# EAGLE board main_board (EAGLE 6.5.0)
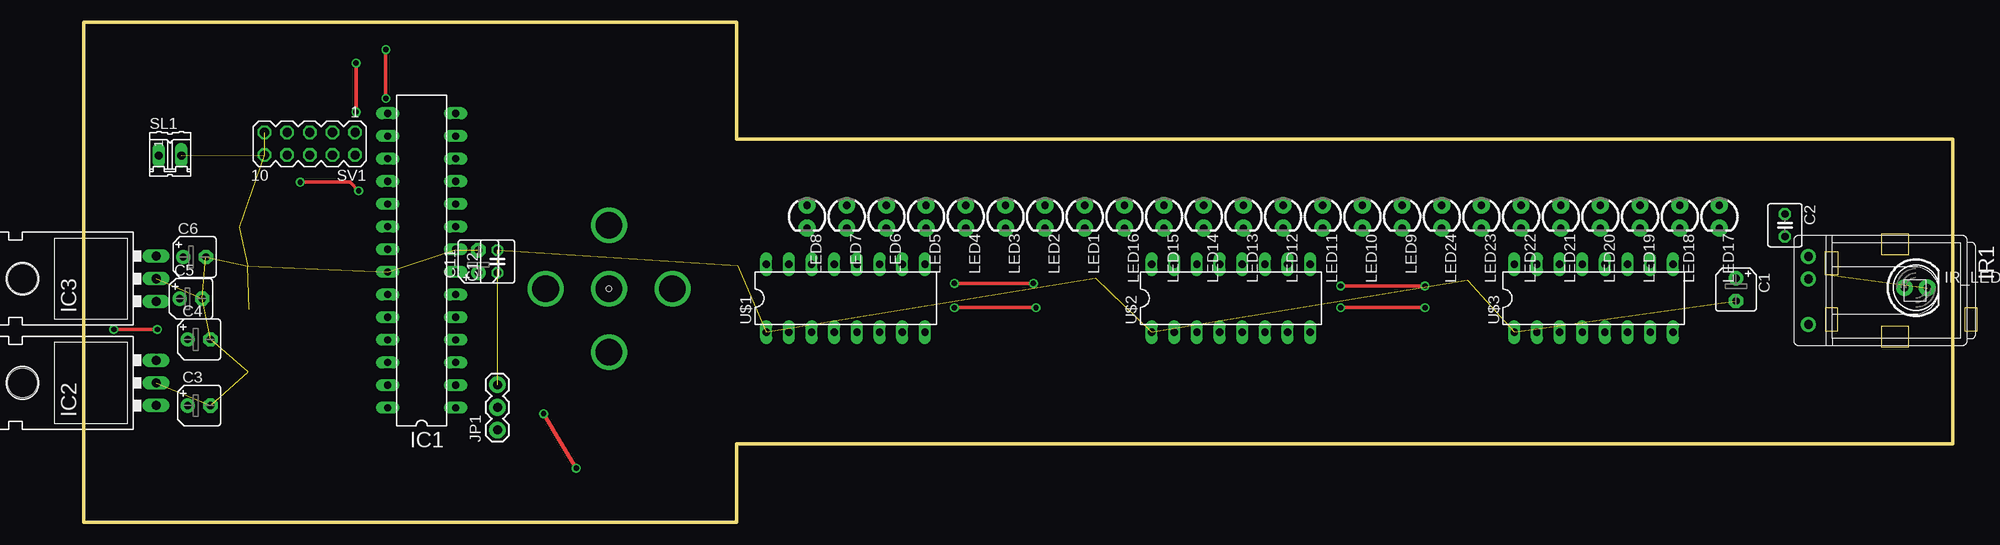
[diagram p0: board, top side]
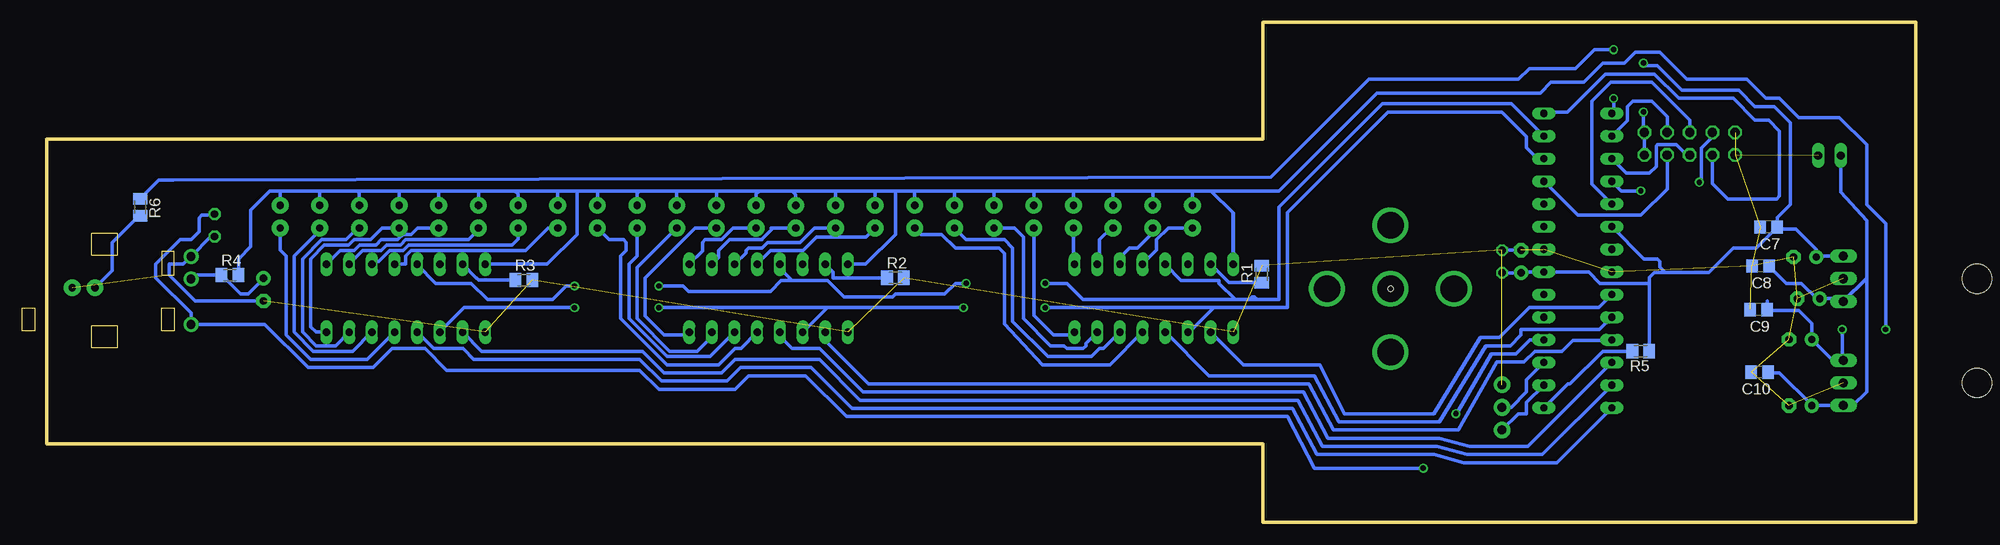
[diagram p1: board, bottom side, seen from below]

Size 209.4 x 56.08 mm. Coordinates in mm from the lower left corner, seen from the top.
Outline: 0,56.08 73.15,56.08 73.15,42.98 209.4,42.98 209.4,8.84 73.15,8.84 73.15,0 0,0 0,56.08
Copper layers (1*16): Top 0.035mm / dielectric 1.5mm / Bottom 0.035mm
Design rules "default": minimum track width 10mil, minimum drill 24mil, track to track 8mil, track to pad 8mil, pad to pad 8mil, via to via 8mil, smd to smd 8mil, copper to edge 40mil, drill to drill 8mil, minimum pad ring 10mil, minimum via ring 8mil, stop-mask expansion 4mil, vias tented up to drill 0mil, thermal gap 10mil
Holes 0.6 mm at 58.83,26.21

## Footprints (pad centres in the part's own frame; a part is rotated, then mirrored left to right if it is on the bottom)
B45181A = drill 0.813 pad 1.6: + -1.27,0 | drill 0.813 pad 1.6 octagon: - 1.27,0
C025-040X050 = drill 0.813 octagon: 1 -1.27,0; 2 1.27,0
C0805 = smd 1.3 x 1.5: 1 -0.95,0; 2 0.95,0
DIL28-3 = drill 0.813 long: 1 -16.51,-3.81; 2 -13.97,-3.81; 3 -11.43,-3.81; 4 -8.89,-3.81; 5 -6.35,-3.81; 6 -3.81,-3.81; 7 -1.27,-3.81; 8 1.27,-3.81; 9 3.81,-3.81; 10 6.35,-3.81; 11 8.89,-3.81; 12 11.43,-3.81; 13 13.97,-3.81; 14 16.51,-3.81; 15 16.51,3.81; 16 13.97,3.81; 17 11.43,3.81; 18 8.89,3.81; 19 6.35,3.81; 20 3.81,3.81; 21 1.27,3.81; 22 -1.27,3.81; 23 -3.81,3.81; 24 -6.35,3.81; 25 -8.89,3.81; 26 -11.43,3.81; 27 -13.97,3.81; 28 -16.51,3.81
TO-220-ALT = drill 1.016 long: GND 0,-3.81; IN -2.54,-3.81; OUT 2.54,-3.81 | hole 3.302: 0,11.176
TSOP17_TB1 = drill 1 pad 1.676: GND 0,-3.81; VO 0,3.81; VS 0,-1.27
LED5MM = drill 0.813 pad 1.88: A -1.27,0; K 1.27,0
1X03 = drill 1.016 pad 1.88: 1 0,0; 2 2.54,0; 3 5.08,0
LED3MM = drill 0.813 pad 1.88: A -1.27,0; K 1.27,0
M0805 = smd 1.3 x 1.6: 1 -0.95,0; 2 0.95,0
02P = drill 0.914 long: 1 -1.27,0; 2 1.27,0
MA05-2 = drill 1.016 octagon: 1 -5.08,-1.27; 2 -5.08,1.27; 3 -2.54,-1.27; 4 -2.54,1.27; 5 0,-1.27; 6 0,1.27; 7 2.54,-1.27; 8 2.54,1.27; 9 5.08,-1.27; 10 5.08,1.27
DIL16 = drill 0.813 long: CLK -3.81,-3.81; GND -8.89,-3.81; LE -1.27,-3.81; OE -1.27,3.81; OUT0 1.27,-3.81; OUT1 3.81,-3.81; OUT2 6.35,-3.81; OUT3 8.89,-3.81; OUT4 8.89,3.81; OUT5 6.35,3.81; OUT6 3.81,3.81; OUT7 1.27,3.81; R-EXT -6.35,3.81; SDI -6.35,-3.81; SDO -3.81,3.81; VCC -8.89,3.81

## Placement (x,y rotation side)
C1  4,7uF  [B45181A]  185.12,26.11 270 top
C2  10nF  [C025-040X050]  190.6,33.33 270 top
C3  47uF  [B45181A]  12.9,13.11 0 top
C4  47uF  [B45181A]  12.9,20.52 0 top
C5  47uF  [B45181A]  11.99,25.1 0 top
C6  47uF  [B45181A]  12.4,29.77 0 top
C7  100nF  [C0805]  16.46,33.12 180 bottom
C8  100nF  [C0805]  17.37,28.75 180 bottom
C9  100nF  [C0805]  17.58,23.88 180 bottom
C10  100nF  [C0805]  17.48,16.87 180 bottom
C11  22uF  [B45181A]  44.2,29.26 90 top
C12  100nF  [C025-040X050]  46.33,29.26 90 top
IC1  MEGA8-P  [DIL28-3]  37.85,29.36 90 top
IC2  5V  [TO-220-ALT]  4.27,15.65 90 top
IC3  3V3  [TO-220-ALT]  4.27,27.33 90 top
IR1  TSOP1730TB1  [TSOP17_TB1]  193.24,26.01 180 top
IR_LED  [LED5MM]  205.28,26.31 0 top
JP1  [1X03]  46.33,10.36 90 top
LED1  [LED3MM]  112.14,34.29 270 top
LED2  [LED3MM]  107.7,34.29 270 top
LED3  [LED3MM]  103.25,34.29 270 top
LED4  [LED3MM]  98.81,34.29 270 top
LED5  [LED3MM]  94.36,34.29 270 top
LED6  [LED3MM]  89.92,34.29 270 top
LED7  [LED3MM]  85.47,34.29 270 top
LED8  [LED3MM]  81.03,34.29 270 top
LED9  [LED3MM]  147.7,34.29 270 top
LED10  [LED3MM]  143.26,34.29 270 top
LED11  [LED3MM]  138.81,34.29 270 top
LED12  [LED3MM]  134.37,34.29 270 top
LED13  [LED3MM]  129.92,34.29 270 top
LED14  [LED3MM]  125.48,34.29 270 top
LED15  [LED3MM]  121.03,34.29 270 top
LED16  [LED3MM]  116.59,34.29 270 top
LED17  [LED3MM]  183.26,34.29 270 top
LED18  [LED3MM]  178.82,34.29 270 top
LED19  [LED3MM]  174.37,34.29 270 top
LED20  [LED3MM]  169.93,34.29 270 top
LED21  [LED3MM]  165.48,34.29 270 top
LED22  [LED3MM]  161.04,34.29 270 top
LED23  [LED3MM]  156.59,34.29 270 top
LED24  [LED3MM]  152.15,34.29 270 top
R1  330  [M0805]  73.25,27.84 90 bottom
R2  330  [M0805]  114.3,27.43 0 bottom
R3  330  [M0805]  155.96,27.18 0 bottom
R4  100  [M0805]  188.87,27.74 0 bottom
R5  1k  [M0805]  30.78,19.2 180 bottom
R6  100  [M0805]  198.93,35.36 270 bottom
SL1  [02P]  9.65,41.15 0 top
SV1  [MA05-2]  25.3,42.47 180 top
U$1  MBI5168GN  [DIL16]  85.34,25.15 0 top
U$2  MBI5168GN  [DIL16]  128.52,25.15 0 top
U$3  MBI5168GN  [DIL16]  169.16,25.15 0 top

## Library data of the parts
C1 C3-C6 C11 R1-R6 = resistor
C2 C7-C10 C12 = rcl
IC1 = atmel; OC_FARNELL: unknown; OC_NEWARK: unknown
IC2 IC3 = SparkFun-PowerIC
IR1 = telefunken; OC_FARNELL: unknown; OC_NEWARK: unknown
IR_LED LED1-LED24 = SparkFun-LED
JP1 = SparkFun-Connectors
SL1 = con-amp-quick; OC_FARNELL: unknown; OC_NEWARK: unknown
SV1 = con-lstb; OC_FARNELL: unknown; OC_NEWARK: unknown
U$1-U$3 = mbi5168gn

## Nets
CE: IC1.16 SV1.3
CLK: IC1.12 U$1.CLK U$2.CLK U$3.CLK
CSN: IC1.11 SV1.4
GND: C1.- C2.2 C3.- C4.- C5.- C6.- C7.2 C8.2 C9.2 C10.2 C11.- C12.2 IC1.8 IC1.22 IC2.GND IC3.GND IR1.GND IR_LED.K JP1.3 R1.2 R2.2 R3.2 SL1.2 SV1.9 SV1.10 U$1.GND U$2.GND U$3.GND
IR: IC1.15 R6.1
IWQ: IC1.14 SV1.8
LE_1: IC1.24 U$1.LE
LE_2: IC1.26 U$2.LE
LE_3: IC1.28 U$3.LE
MI: IC1.18 SV1.7
MO: IC1.17 SV1.6
N$1: LED8.K U$1.OUT7
N$2: LED7.K U$1.OUT6
N$3: LED6.K U$1.OUT5
N$4: LED5.K U$1.OUT4
N$5: LED4.K U$1.OUT3
N$6: LED3.K U$1.OUT2
N$7: LED2.K U$1.OUT1
N$8: LED1.K U$1.OUT0
N$9: LED17.K U$3.OUT0
N$10: LED18.K U$3.OUT1
N$11: LED19.K U$3.OUT2
N$12: LED20.K U$3.OUT3
N$13: LED21.K U$3.OUT4
N$14: LED22.K U$3.OUT5
N$15: LED23.K U$3.OUT6
N$16: LED24.K U$3.OUT7
N$17: LED13.K U$2.OUT4
N$18: LED14.K U$2.OUT5
N$19: LED15.K U$2.OUT6
N$20: LED16.K U$2.OUT7
N$21: LED12.K U$2.OUT3
N$22: LED11.K U$2.OUT2
N$23: LED10.K U$2.OUT1
N$24: LED9.K U$2.OUT0
N$25: C3.+ C5.+ C8.1 C10.1 IC2.IN IC3.IN SL1.1
N$26: R1.1 U$1.R-EXT
N$28: C1.+ IR1.VS R4.1
N$29: R3.1 U$3.R-EXT
N$30: R2.1 U$2.R-EXT
N$35: IR_LED.A R6.2
N$36: IC1.1 R5.2
OE: IC1.13 U$1.OE U$2.OE U$3.OE
RXD: IC1.2 JP1.1
SCK: IC1.19 SV1.5
SDI_1: IC1.23 U$1.SDI
SDI_2: IC1.25 U$2.SDI
SDI_3: IC1.27 U$3.SDI
TSOP: C2.1 IC1.4 IR1.VO
TXD: IC1.3 JP1.2
VCC3V3: C6.+ C7.1 C11.+ C12.1 IC1.7 IC1.20 IC3.OUT R5.1 SV1.1 SV1.2
VCC5V: C4.+ C9.1 IC2.OUT LED1.A LED2.A LED3.A LED4.A LED5.A LED6.A LED7.A LED8.A LED9.A LED10.A LED11.A LED12.A LED13.A LED14.A LED15.A LED16.A LED17.A LED18.A LED19.A LED20.A LED21.A LED22.A LED23.A LED24.A R4.2 U$1.VCC U$2.VCC U$3.VCC

## Tracks (layer width: path | path; a pad name or v marks a point on that pad's centre or on a via)
CE
  Bottom 0.406: SV1.3 27.84,45.52 29.57,47.24 31.7,47.24 32.31,46.64 32.31,45.06 IC1.16
CLK  (via drill 0.6)
  Top 0.406: v97.54,24.08 v106.68,24.08 | v140.82,24.08 v150.27,24.08
  Bottom 0.406: U$1.CLK 81.38,21.34 78.64,24.08 | 78.64,24.08 v97.54,24.08 | v106.68,24.08 121.92,24.08 | U$2.CLK 124.66,21.34 121.92,24.08 | 121.92,24.08 v140.82,24.08 | v150.27,24.08 162.61,24.08 U$3.CLK | 78.64,24.08 70.41,24.08 70.41,34.75 59.13,46.03 46.33,46.03 43.59,43.28 43.59,42.01 42.37,40.79 | IC1.12 42.37,40.79 | 42.37,40.79 42.62,40.79
CSN
  Bottom 0.406: SV1.4 27.84,37.39 30.79,34.44 37.85,34.44 IC1.11
GND  (24 unrouted)
  Bottom 0.406: 41.76,30.53 IC1.8 | C11.- C12.2 | C1.- 192.79,24.84 195.68,27.74 195.68,28.96 194.11,28.96 IR1.GND 191.01,32.06 C2.2
IR  (via drill 0.6)
  Top 0.406: v33.83,47.55 v33.83,53.04
  Bottom 0.406: IC1.15 33.83,45.87 v33.83,47.55 | v33.83,53.04 35.97,53.04 38.1,50.9 43.28,50.9 44.5,49.68 61.27,49.68 72.24,38.71 195.24,38.41 196.84,38.41 R6.1
IWQ
  Bottom 0.406: IC1.14 41.5,46.03 39.01,46.03 34.75,50.29 29.26,50.29 26.52,47.55 20.42,47.55 17.98,45.11 16.46,45.11 15.24,43.89 15.24,36.58 15.55,36.27 21.03,36.27 22.76,38 SV1.8
LE_1
  Bottom 0.406: IC1.24 35.41,21.64 44.2,21.64 44.2,21.03 45.42,19.81 48.16,19.81 53.34,11.28 64.62,11.28 67.36,16.46 79.2,16.46 U$1.LE
LE_2
  Bottom 0.406: IC1.26 43.43,8.54 49.99,8.54 53.34,9.45 65.84,9.45 68.58,14.63 117.96,14.63 122.83,19.51 125.88,19.51 127.25,20.88 U$2.LE
LE_3
  Bottom 0.406: U$3.LE 166.06,19.51 162.76,19.51 161.54,18.29 142.95,18.29 140.51,15.85 133.2,15.85 131.67,17.37 123.75,17.37 119.18,12.8 69.8,12.8 67.06,7.62 53.95,7.62 50.6,6.71 40.18,6.71 IC1.28
MI  (via drill 0.6)
  Top 0.406: v24.23,38.15 29.82,38.15 v30.79,37.19
  Bottom 0.406: SV1.7 22.76,43.18 23.98,41.96 23.98,38.41 v24.23,38.15 | v30.79,37.19 32.97,37.19 IC1.18
MO
  Bottom 0.406: SV1.6 25.3,40.84 26.82,42.37 28.9,42.37 29.06,42.22 29.06,39.93 29.82,39.17 32.41,39.17 IC1.17
N$1
  Bottom 0.406: LED8.K 83.72,33.02 85.04,31.7 85.04,30.53 U$1.OUT7
N$2
  Bottom 0.406: LED7.K 85.47,32.49 87.17,30.79 88.09,30.79 89,29.87 89,29.11 U$1.OUT6
N$3
  Bottom 0.406: LED6.K 90.12,33.02 91.44,31.7 91.44,29.21 U$1.OUT5
N$4
  Bottom 0.406: LED5.K 94.36,29.08 U$1.OUT4
N$5
  Bottom 0.406: U$1.OUT3 94.54,21.03 96.62,21.03 98.81,23.22 LED4.K
N$6
  Bottom 0.406: U$1.OUT2 92.96,20.07 92.96,19.81 93.27,19.51 95.1,19.51 95.4,19.81 96.93,19.81 99.97,22.86 99.97,32 100.99,33.02 LED3.K
N$7
  Bottom 0.406: LED2.K 106.38,31.7 102.11,31.7 101.19,30.79 101.19,22.56 97.23,18.59 92.35,18.59 91.44,19.51 90.98,19.51 U$1.OUT1
N$8
  Bottom 0.406: LED1.K 111.43,32.31 109.12,32.31 107.59,30.79 102.72,30.79 102.11,30.18 102.11,22.25 97.84,17.68 90.27,17.68 U$1.OUT0
N$9
  Bottom 0.406: LED17.K 183.26,30.56 182.57,29.87 182.57,21.03 179.83,18.29 173.48,18.29 U$3.OUT0
N$10
  Bottom 0.406: LED18.K 178.82,32.72 181.66,29.87 181.66,21.34 179.53,19.2 175.11,19.2 U$3.OUT1
N$11
  Bottom 0.406: LED19.K 174.55,33.02 175.87,31.7 178.61,31.7 180.75,29.57 180.75,21.34 179.22,19.81 177.04,19.81 U$3.OUT2
N$12
  Bottom 0.406: LED20.K 171.81,33.02 173.13,31.7 174.96,31.7 175.56,31.09 178.31,31.09 179.83,29.57 179.83,21.95 179.22,21.34 U$3.OUT3
N$13
  Bottom 0.406: LED21.K 167.84,33.02 168.55,32.31 169.47,32.31 170.08,31.7 171.91,31.7 172.52,31.09 174.35,31.09 174.96,30.48 176.53,30.48 U$3.OUT4
N$14
  Bottom 0.406: LED22.K 161.04,32.82 162.15,31.7 169.16,31.7 169.77,31.09 171.3,31.09 171.91,30.48 173.99,30.48 U$3.OUT5
N$15
  Bottom 0.406: LED23.K 156.59,31.78 157.28,31.09 168.86,31.09 169.47,30.48 170.99,30.48 172.21,29.26 172.67,29.26 U$3.OUT6
N$16
  Bottom 0.406: LED24.K 153.21,33.02 155.75,30.48 168.55,30.48 169.16,29.87 169.16,28.96 U$3.OUT7
N$17
  Bottom 0.406: LED13.K 132.49,33.02 133.81,31.7 135.64,31.7 135.94,31.4 135.94,30.43 U$2.OUT4
N$18
  Bottom 0.406: LED14.K 128.02,33.02 | 128.02,33.02 128.22,33.02 | U$2.OUT5 134.11,29.72 134.11,30.48 132.89,31.7 129.23,31.7 129.23,31.8 128.02,33.02
N$19
  Bottom 0.406: LED15.K 123.34,33.02 124.97,31.4 128.63,31.4 129.23,30.79 130.76,30.79 131.06,30.48 131.06,30.23 U$2.OUT6
N$20
  Bottom 0.406: U$2.OUT7 129.79,29.01 128.32,30.48 124.66,30.48 123.14,32 117.6,32 LED16.K
N$21
  Bottom 0.406: LED12.K 136.75,33.02 142.34,27.43 142.34,23.17 140.21,21.03 137.72,21.03 U$2.OUT3
N$22
  Bottom 0.406: U$2.OUT2 134.87,20.88 136.55,19.2 139.6,19.2 143.26,22.86 143.26,28.58 LED11.K
N$23
  Bottom 0.406: U$2.OUT1 135.08,18.59 139.9,18.59 144.17,22.86 144.17,28.96 143.26,29.87 LED10.K
N$24
  Bottom 0.406: U$2.OUT0 131.62,19.51 132.28,19.51 134.11,17.68 139.9,17.68 145.09,22.86 145.09,29.87 144.47,30.48 144.47,31.4 144.78,31.7 146.38,31.7 LED9.K
N$25
  Bottom 0.406: 5.49,27.43 5.49,27.38 | 5.49,27.38 IC3.IN | IC3.IN 8.08,24.84 5.49,27.43 | C10.1 16.42,16.76 15.24,16.76 11.63,13.16 C3.+ IC2.IN 7.01,13.11 5.49,14.63 5.49,27.38 | IC3.IN 8.38,25.1 C5.+ 11.07,25.1 12.8,26.82 14.49,26.82 C8.1 | 5.49,27.43 5.49,33.83 8.38,37.03 SL1.1
N$26
  Bottom 0.406: R1.1 76.96,26.92 U$1.R-EXT
N$27  (via drill 3)
  other vias: 58.83,33.33
N$28
  Bottom 0.406: C1.+ 185.17,27.43 185.17,27.28 186.84,25.6 187.69,25.6 R4.1 192.79,27.74 IR1.VS
N$29
  Bottom 0.406: R3.1 160.99,27.18 161.24,27.43 161.29,27.43 U$3.R-EXT
N$30
  Bottom 0.406: R2.1 121.31,27.43 121.31,28.09 U$2.R-EXT
N$31  (via drill 3)
  other vias: 51.71,26.21
N$32  (via drill 3)
  other vias: 58.83,19.1
N$33  (via drill 3)
  other vias: 65.94,26.21
N$34  (via drill 3)
  other vias: 58.83,26.21
N$35
  Bottom 0.406: R6.2 199.07,34.41 202.08,31.4 202.08,28.25 IR_LED.A
N$36
  Bottom 0.406: R5.2 35.05,19.2 38.71,15.55 38.96,15.55 IC1.1
OE  (via drill 0.6)
  Top 0.406: v97.54,26.82 v106.38,26.82 | v140.82,26.52 v150.27,26.52
  Bottom 0.406: U$1.OE 84.07,28.91 82.3,27.13 78.03,27.13 78.03,26.82 76.2,24.99 | 76.2,24.99 74.68,24.99 | 74.68,24.99 73.76,24.99 | U$2.OE 127.25,28.5 | 126.8,28.04 127.1,28.04 127.25,28.19 127.25,28.5 | 126.8,28.04 125.88,27.13 | 125.88,27.13 121.92,27.13 120.09,25.3 114.61,25.3 114.3,25.6 108.81,25.6 107.59,26.82 v106.38,26.82 | U$3.OE 167.89,28.91 165.81,26.82 161.85,26.82 160.02,24.99 152.71,24.99 151.18,26.52 v150.27,26.52 | 73.76,24.99 71.32,24.99 71.32,35.36 59.74,46.94 45.26,46.94 IC1.13 | 73.76,24.99 74.07,25.3 74.37,25.3 74.68,24.99 | 76.2,24.99 93.27,24.99 95.1,26.82 v97.54,26.82 | 127.25,28.5 127.41,28.65 | 127.25,28.5 126.8,28.04 | 125.88,27.13 127.1,27.13 128.32,25.91 137.47,25.91 138.07,26.52 v140.82,26.52
RXD
  Bottom 0.406: IC1.2 43.59,13.46 43.59,12.19 44.5,12.19 JP1.1
SCK
  Bottom 0.406: SV1.5 25.3,45.11 29.57,49.38 34.14,49.38 36.27,47.24 36.27,37.95 IC1.19
SDI_1
  Bottom 0.406: U$1.SDI 75.34,17.68 66.75,17.68 64.01,12.19 53.95,12.19 48.77,20.73 46.63,20.73 43.28,24.08 35.51,24.08 IC1.23
SDI_2
  Bottom 0.406: U$2.SDI 121.92,21.08 121.92,20.12 117.35,15.55 67.97,15.55 65.23,10.36 51.21,10.36 46.94,17.98 43.89,17.98 42.67,19.2 39.62,19.2 38.41,20.42 34.09,20.42 IC1.25
SDI_3
  Bottom 0.406: U$3.SDI 160.68,19.2 142.65,19.2 140.21,16.76 133.81,16.76 132.28,18.29 122.83,18.29 118.26,13.72 69.19,13.72 66.45,8.54 53.65,8.54 50.29,7.62 41.81,7.62 IC1.27
TSOP  (via drill 0.6)
  Top 0.406: v51.51,12.19 v55.17,6.1
  Bottom 0.406: IC1.4 43.23,20.47 44.81,18.9 47.55,18.9 51.21,12.5 v51.51,12.19 | v55.17,6.1 67.36,6.1 70.41,11.89 119.79,11.89 124.36,16.46 130.76,16.46 132.28,14.94 140.82,14.94 142.95,17.07 164.59,17.07 167.03,19.51 170.69,19.51 172.82,17.37 180.14,17.37 184.96,22.2 IR1.VO 193.24,23.47 197.21,27.43 197.21,28.96 194.46,31.7 193.24,31.7 192.33,32.61 192.33,34.14 192.02,34.44 190.81,34.44 190.65,34.59 C2.1
TXD
  Bottom 0.406: IC1.3 43.59,16 43.59,14.63 45.31,12.9 JP1.2
VCC3V3  (via drill 0.6)
  Top 0.406: v30.48,46.03 v30.48,51.51
  Bottom 0.406: IC3.OUT 11.02,29.87 C6.+ 11.12,30.63 13.41,32.92 15.31,32.92 C7.1 | SV1.2 SV1.1 30.48,43.74 v30.48,46.03 | v30.48,51.51 30.18,51.21 28.96,51.21 26.21,48.46 19.81,48.46 17.98,46.64 15.85,46.64 14.02,44.81 14.02,35.66 15.51,34.17 C7.1 | C12.1 C11.+ 44.09,28.09 IC1.7 36.63,28.09 35.36,26.82 29.84,26.82 | 33.98,33.22 IC1.20 30.43,29.57 28.96,29.57 28.65,29.26 28.65,28.65 28.04,28.04 | R5.1 29.84,26.82 | 29.84,26.82 29.84,27.47 29.26,28.04 28.04,28.04 | 28.04,28.04 23.16,28.04 20.42,30.79 17.85,30.79 C7.1
VCC5V  (via drill 0.6)
  Top 0.406: v3.35,21.64 v8.23,21.64
  Bottom 0.406: 85.34,35.56 LED7.A 85.47,37.01 85.65,37.19 | 85.65,37.19 81.08,37.19 81.03,37.14 | 85.65,37.19 89.92,37.19 | 89.92,37.19 94.49,37.19 | 94.49,37.19 98.76,37.19 | 98.76,37.19 103.33,37.19 | 103.33,37.19 107.9,37.19 | 107.9,37.19 112.17,37.19 | 112.17,37.19 114.3,37.19 | 114.3,37.19 116.74,37.19 | 116.74,37.19 121.01,37.19 | 121.01,37.19 125.88,37.19 | 125.88,37.19 129.54,37.19 | 129.54,37.19 134.42,37.19 | 134.42,37.19 138.99,37.19 | 138.99,37.19 142.95,37.19 | 142.95,37.19 147.83,37.19 | 147.83,37.19 149.96,37.19 | 149.96,37.19 152.09,37.19 | 152.09,37.19 156.97,37.19 | 156.97,37.19 160.93,37.19 | 160.93,37.19 165.51,37.19 | 165.51,37.19 169.77,37.19 | 169.77,37.19 174.65,37.19 | 174.65,37.19 178.92,37.19 | 178.92,37.19 183.19,37.19 | 183.19,37.19 184.4,37.19 186.54,35.05 186.54,30.95 187.92,29.57 R4.2 | LED17.A 183.26,37.11 183.19,37.19 | LED8.A 81.03,37.14 | LED6.A 89.92,37.19 | LED5.A 94.36,37.06 94.49,37.19 | LED4.A 98.81,37.14 98.76,37.19 | LED3.A 103.25,37.11 103.33,37.19 | LED2.A 107.7,36.98 107.9,37.19 | LED1.A 112.14,37.16 112.17,37.19 | LED16.A 116.59,37.03 116.74,37.19 | LED15.A 121.03,37.16 121.01,37.19 | LED14.A 125.48,36.78 125.88,37.19 | LED13.A 129.92,36.8 129.54,37.19 | LED12.A 134.37,37.14 134.42,37.19 | LED11.A 138.81,37.01 138.99,37.19 | LED10.A 143.26,36.88 142.95,37.19 | LED9.A 147.7,37.06 147.83,37.19 | LED24.A 152.15,37.14 152.09,37.19 | LED23.A 156.59,36.8 156.97,37.19 | LED22.A 161.04,37.08 160.93,37.19 | LED21.A 165.48,37.16 165.51,37.19 | LED20.A 169.93,37.03 169.77,37.19 | LED19.A 174.37,36.91 174.65,37.19 | LED18.A 178.82,37.08 178.92,37.19 | 76.51,34.75 76.51,28.96 U$1.VCC 76.45,34.7 76.51,34.75
  Bottom 0.406: 76.51,34.75 78.94,37.19 | 78.94,37.19 80.98,37.19 81.03,37.14 | U$3.VCC 153.31,28.96 149.96,32.31 149.96,37.19 | U$2.VCC 117.65,28.96 114.3,32.31 114.3,37.19 | 16.63,24.86 C9.1 16.52,23.78 13.11,23.78 11.63,22.3 C4.+ 9.3,18.19 IC2.OUT 8.23,18.34 v8.23,21.64 | 78.94,37.19 71.32,37.19 60.35,48.16 42.06,48.16 40.84,49.38 37.19,49.38 35.05,51.51 32.61,51.51 31.39,52.73 28.65,52.73 25.6,49.68 18.9,49.68 16.76,47.55 15.24,47.55 13.11,45.42 8.53,45.42 5.49,42.37 5.49,35.66 3.35,33.53 v3.35,21.64